# Altium PCB walktimizer_v1.PcbDoc
Units mil, origin at the board's own origin, x right, y up, seen from the top; angles counter-clockwise.
Board outline 1262.8 x 1367.13 mil, 4 copper layers (Top Layer, GND, VREG, Bottom Layer), stack 61.811 mil thick; 30 components, 25 nets, 140 pads, 14 vias.
Unrouted connection lines stored in the file: 45.
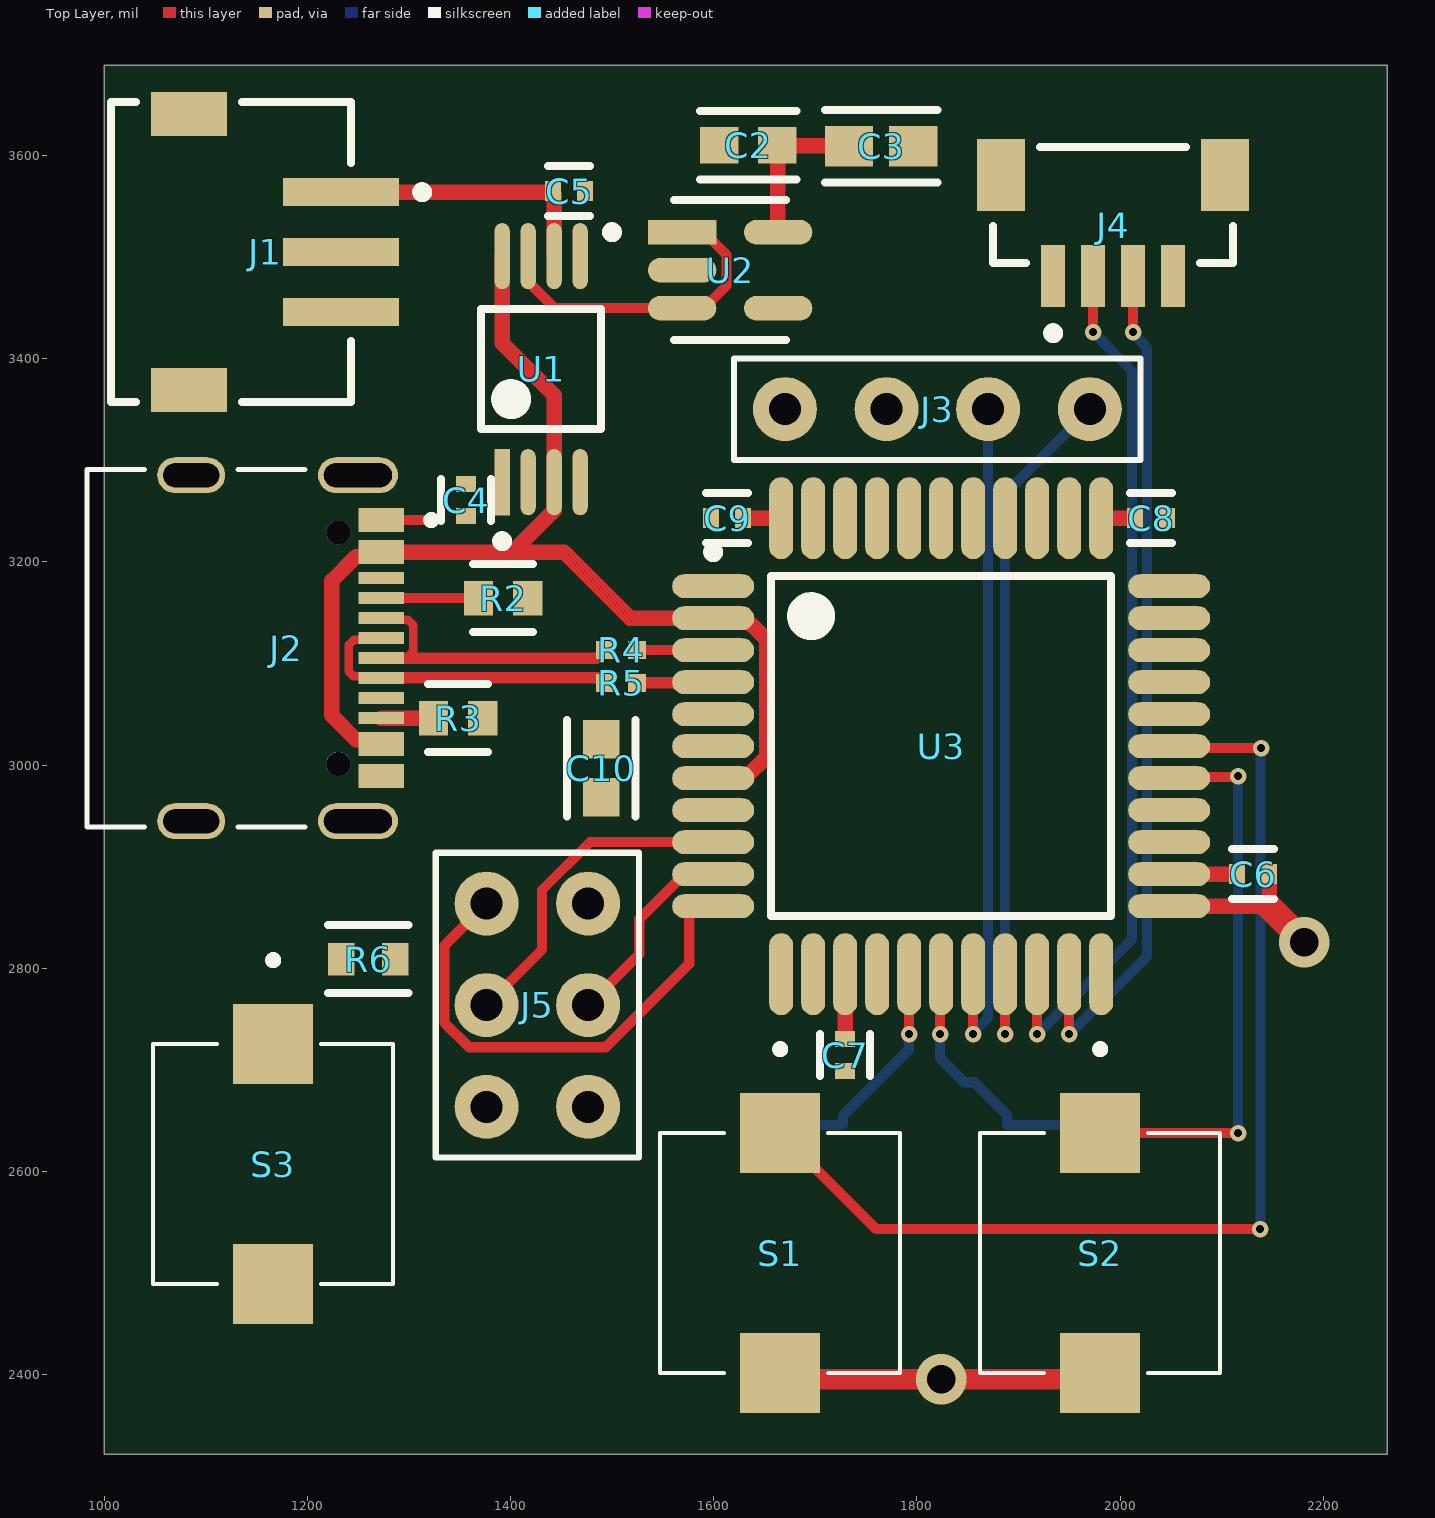
[diagram p0: Top Layer view]
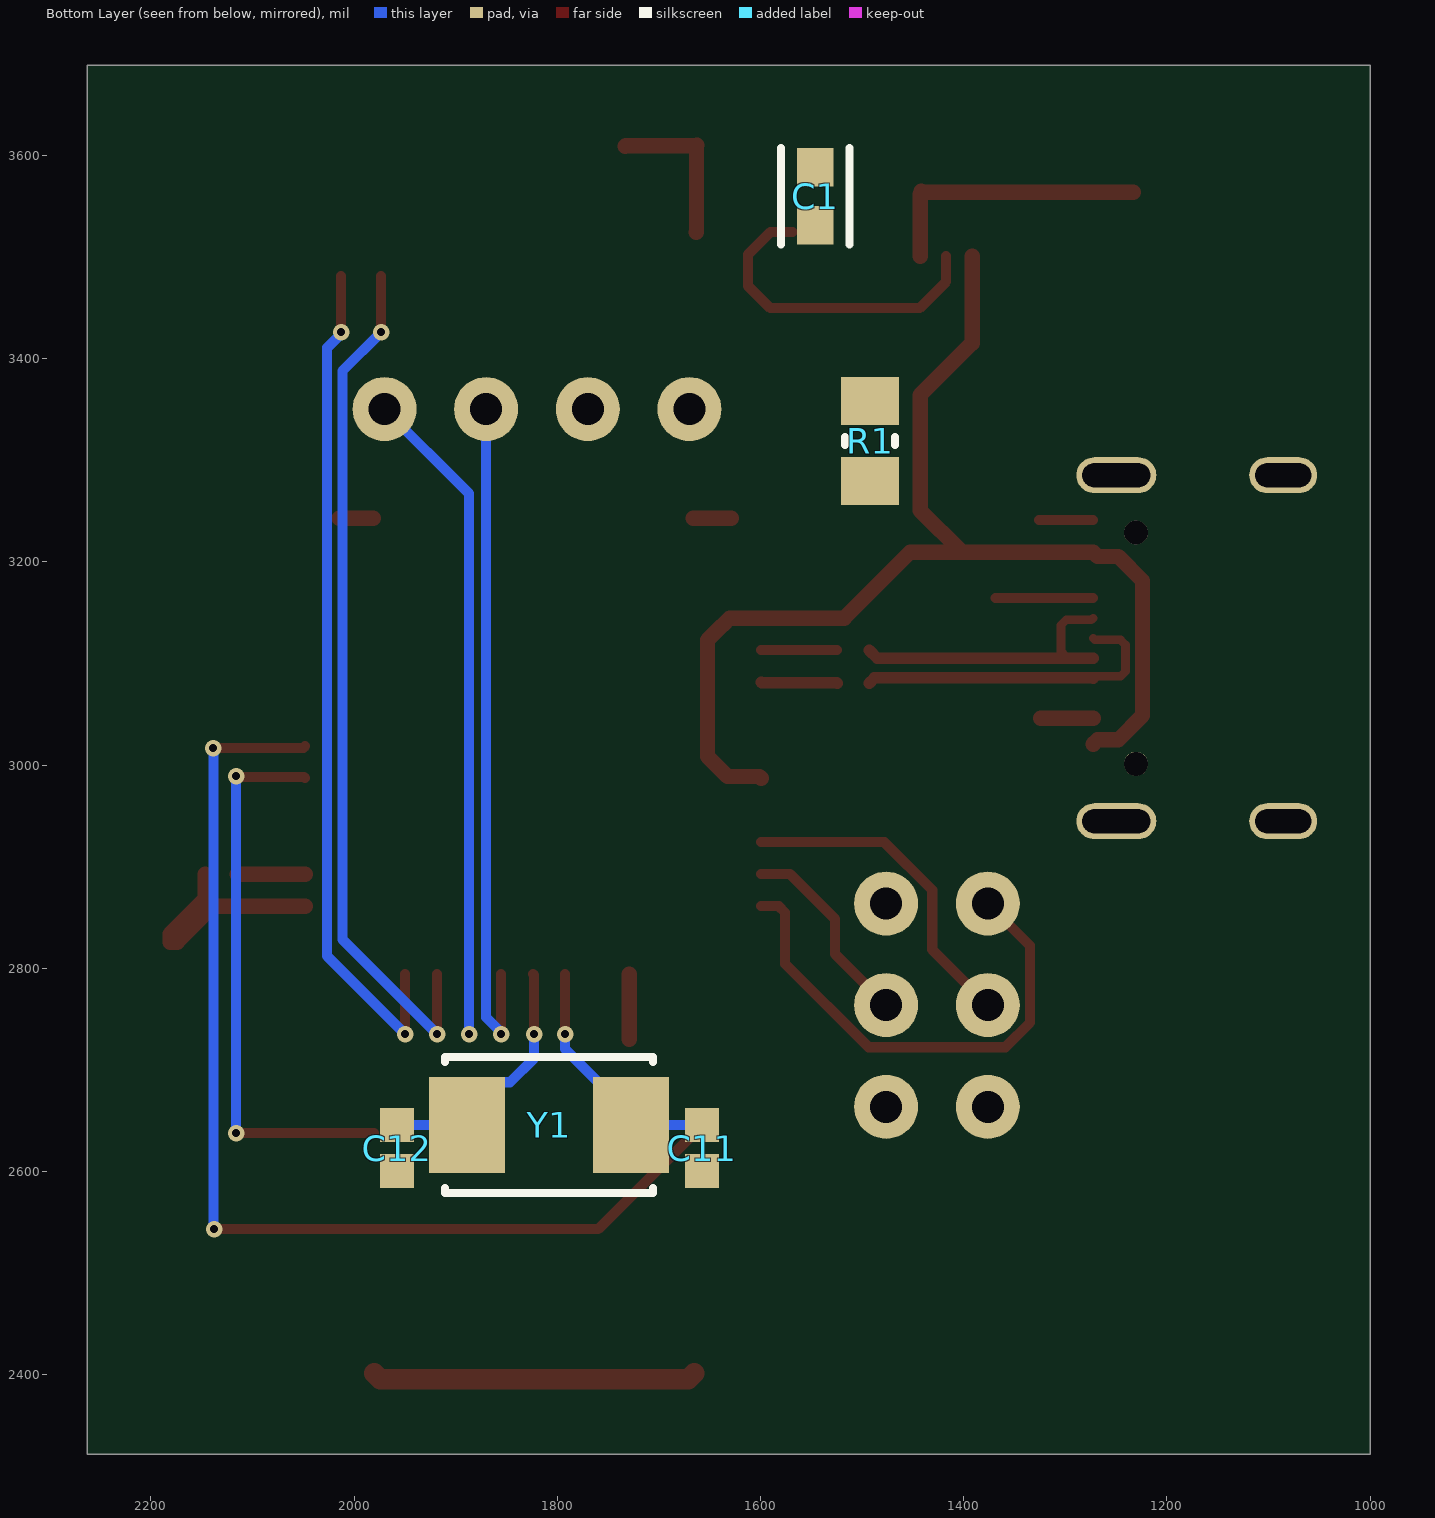
[diagram p1: Bottom Layer view, seen from below]
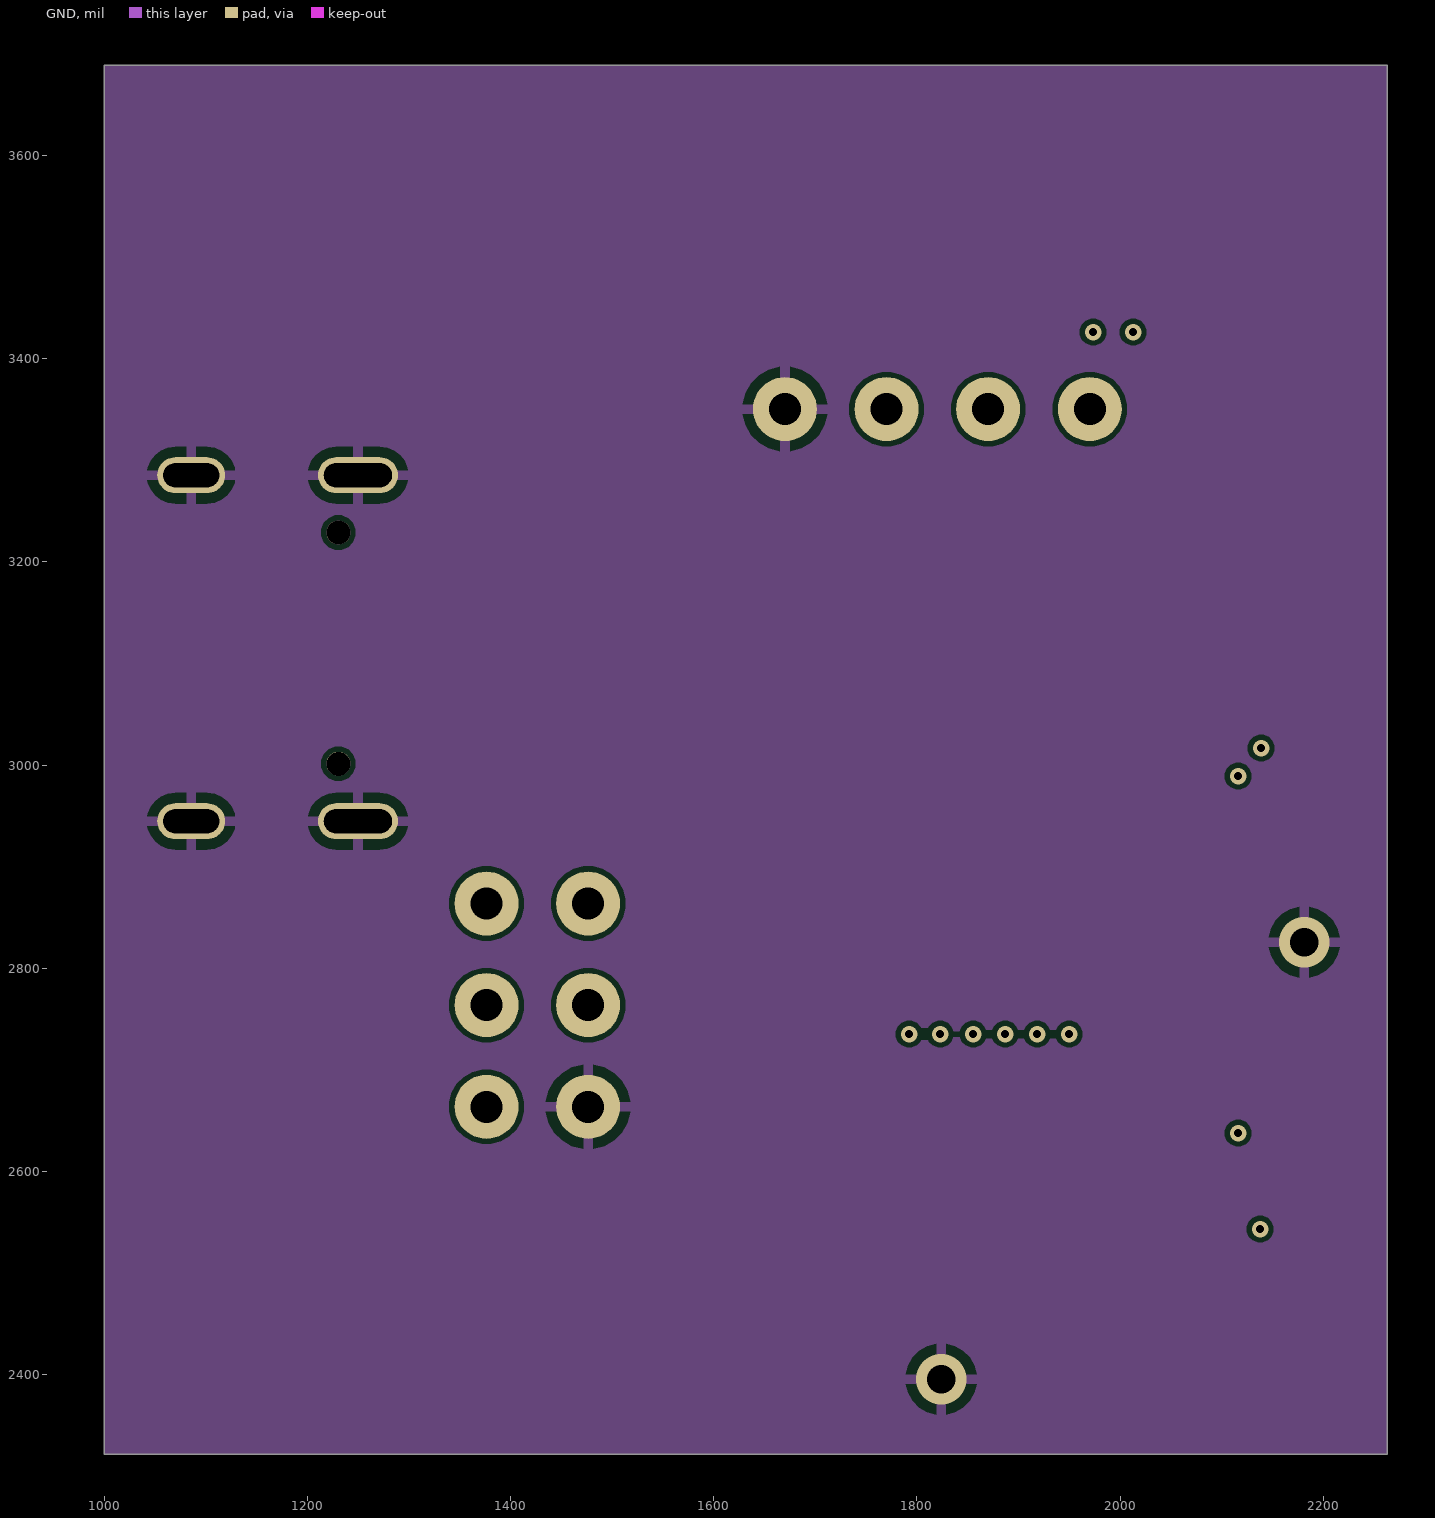
[diagram p2: GND]
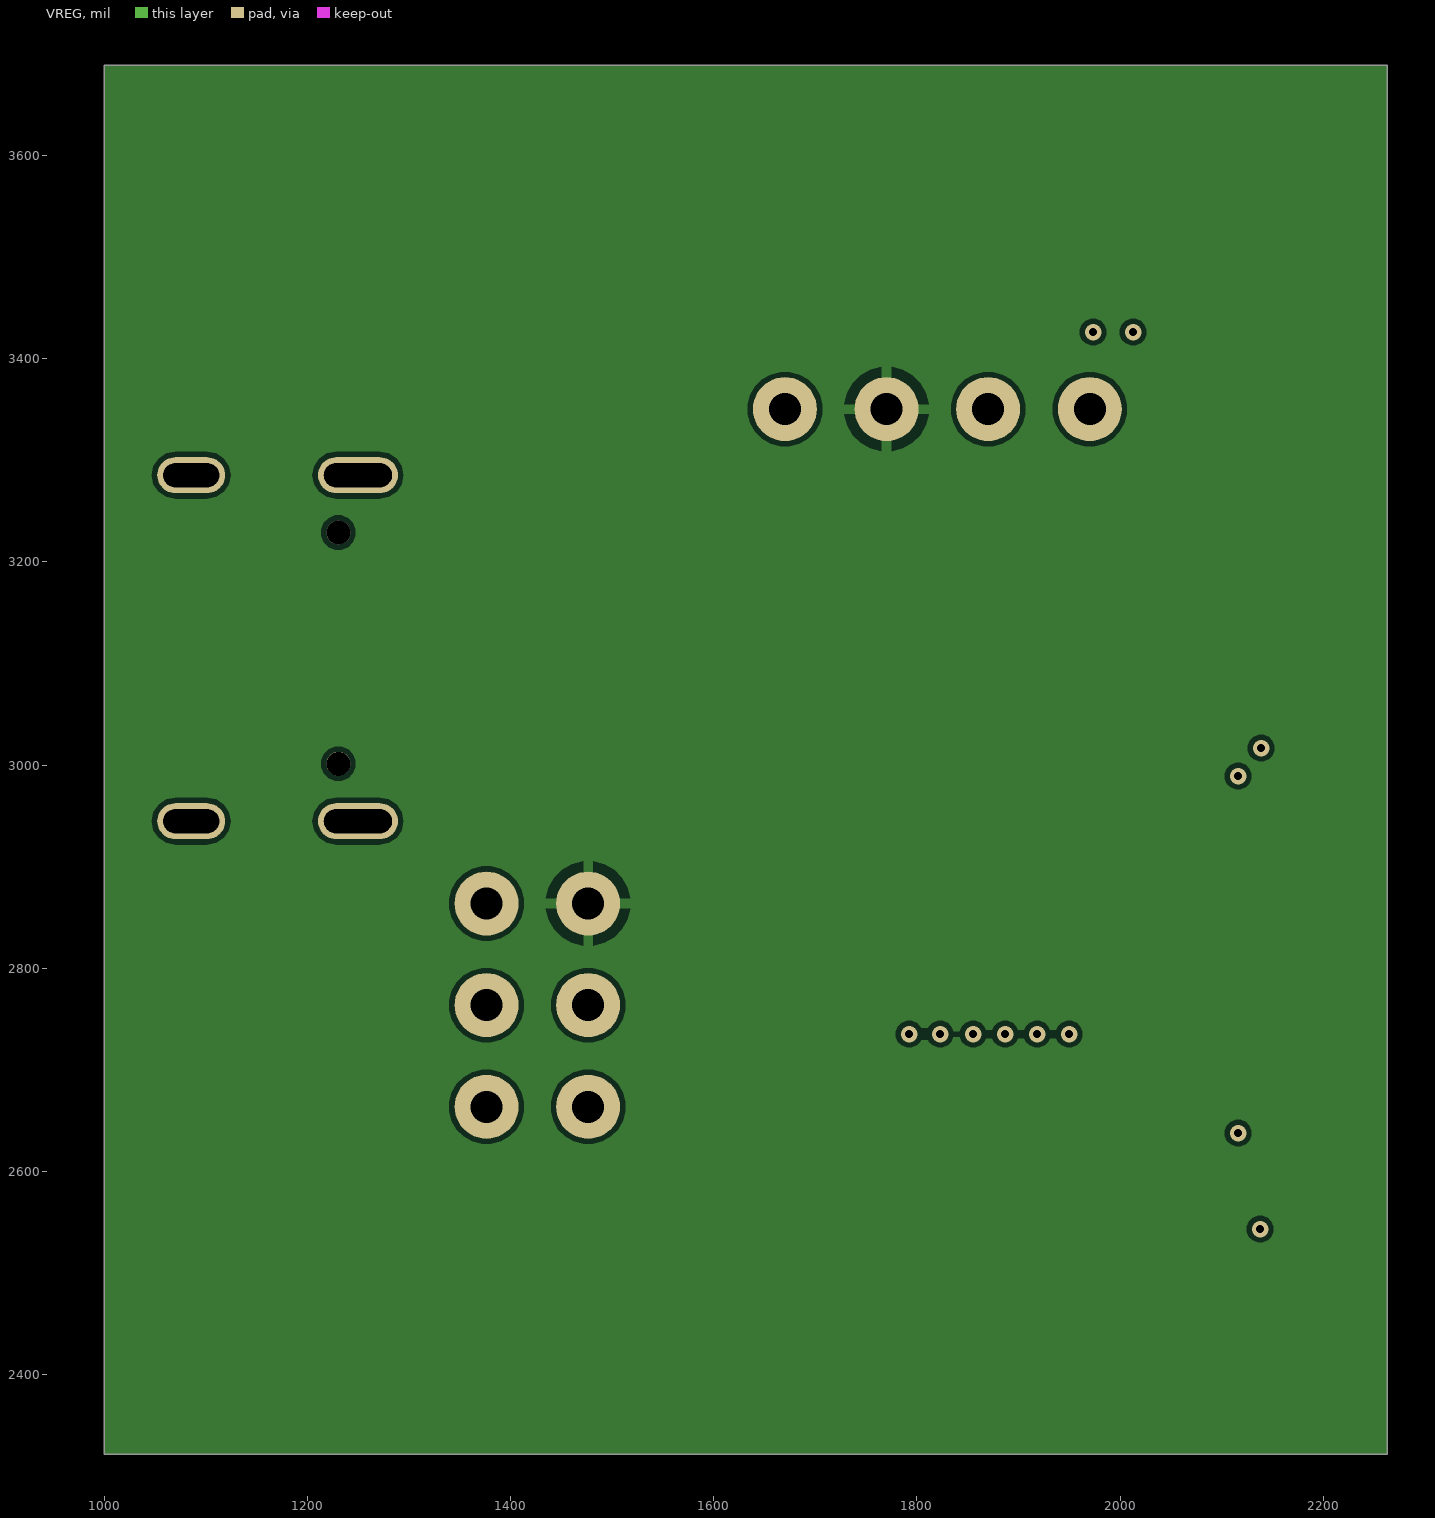
[diagram p3: VREG]
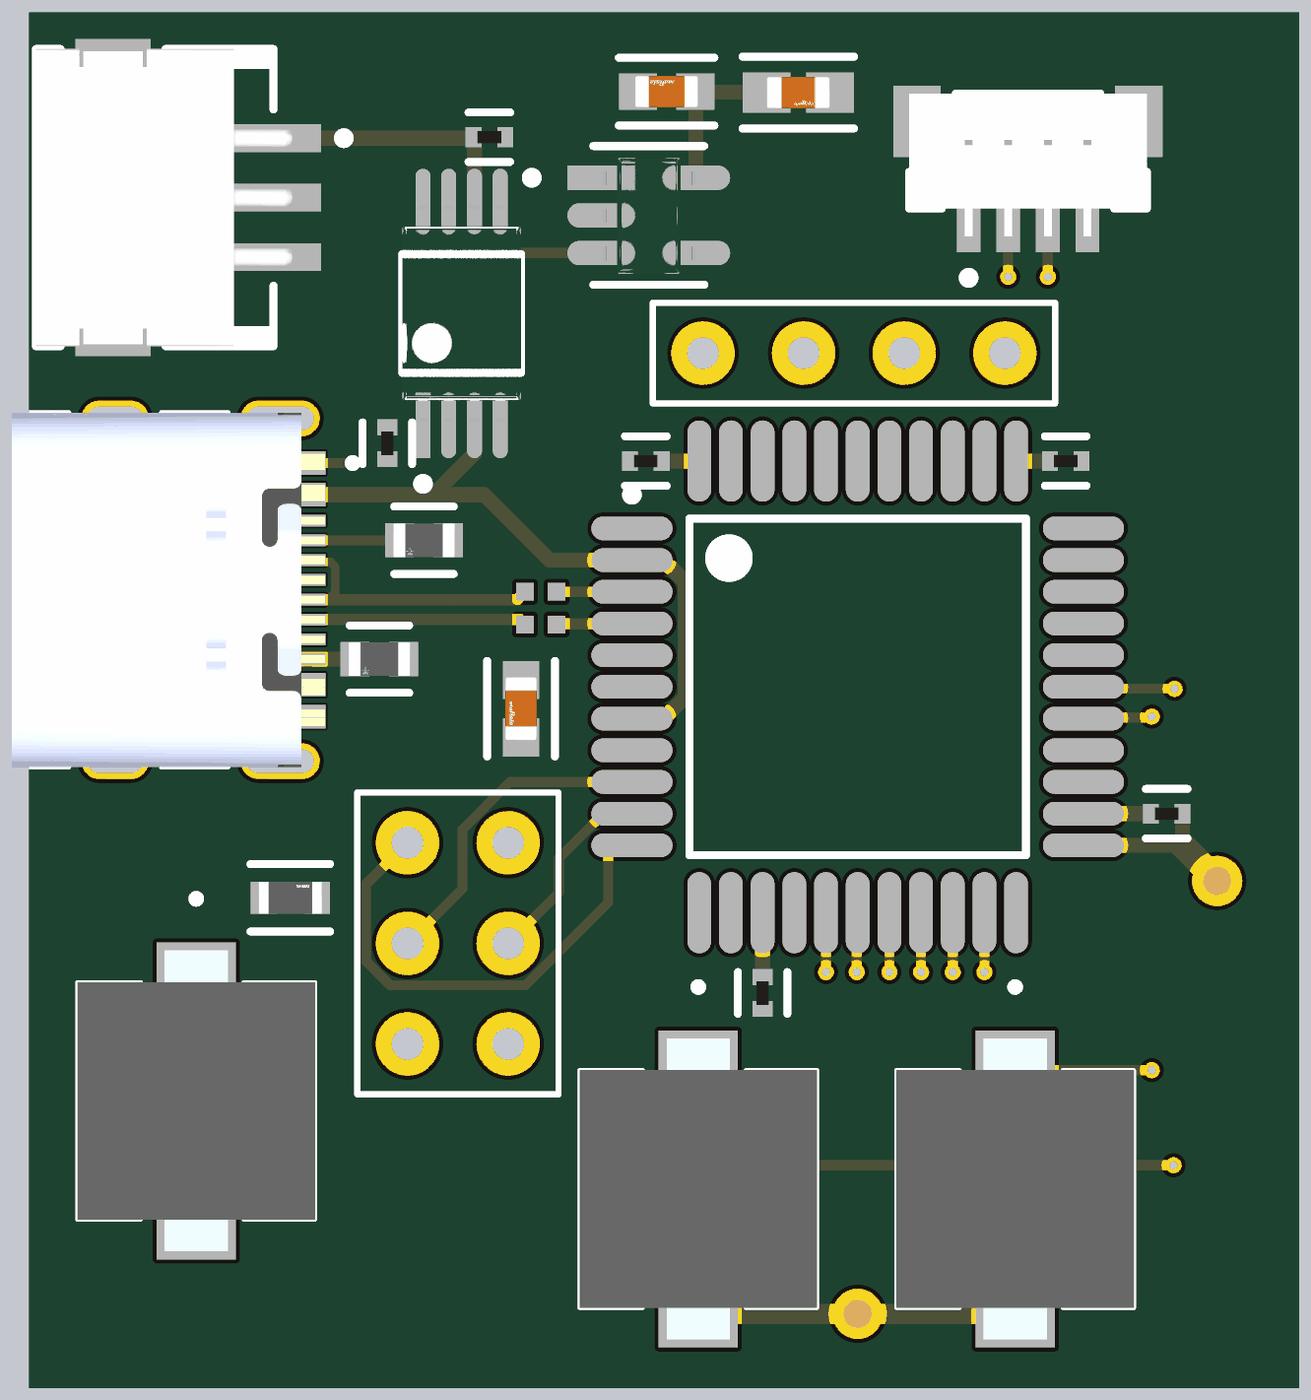
[diagram p4: 3D render of the assembled board from above, using the file's embedded part models]
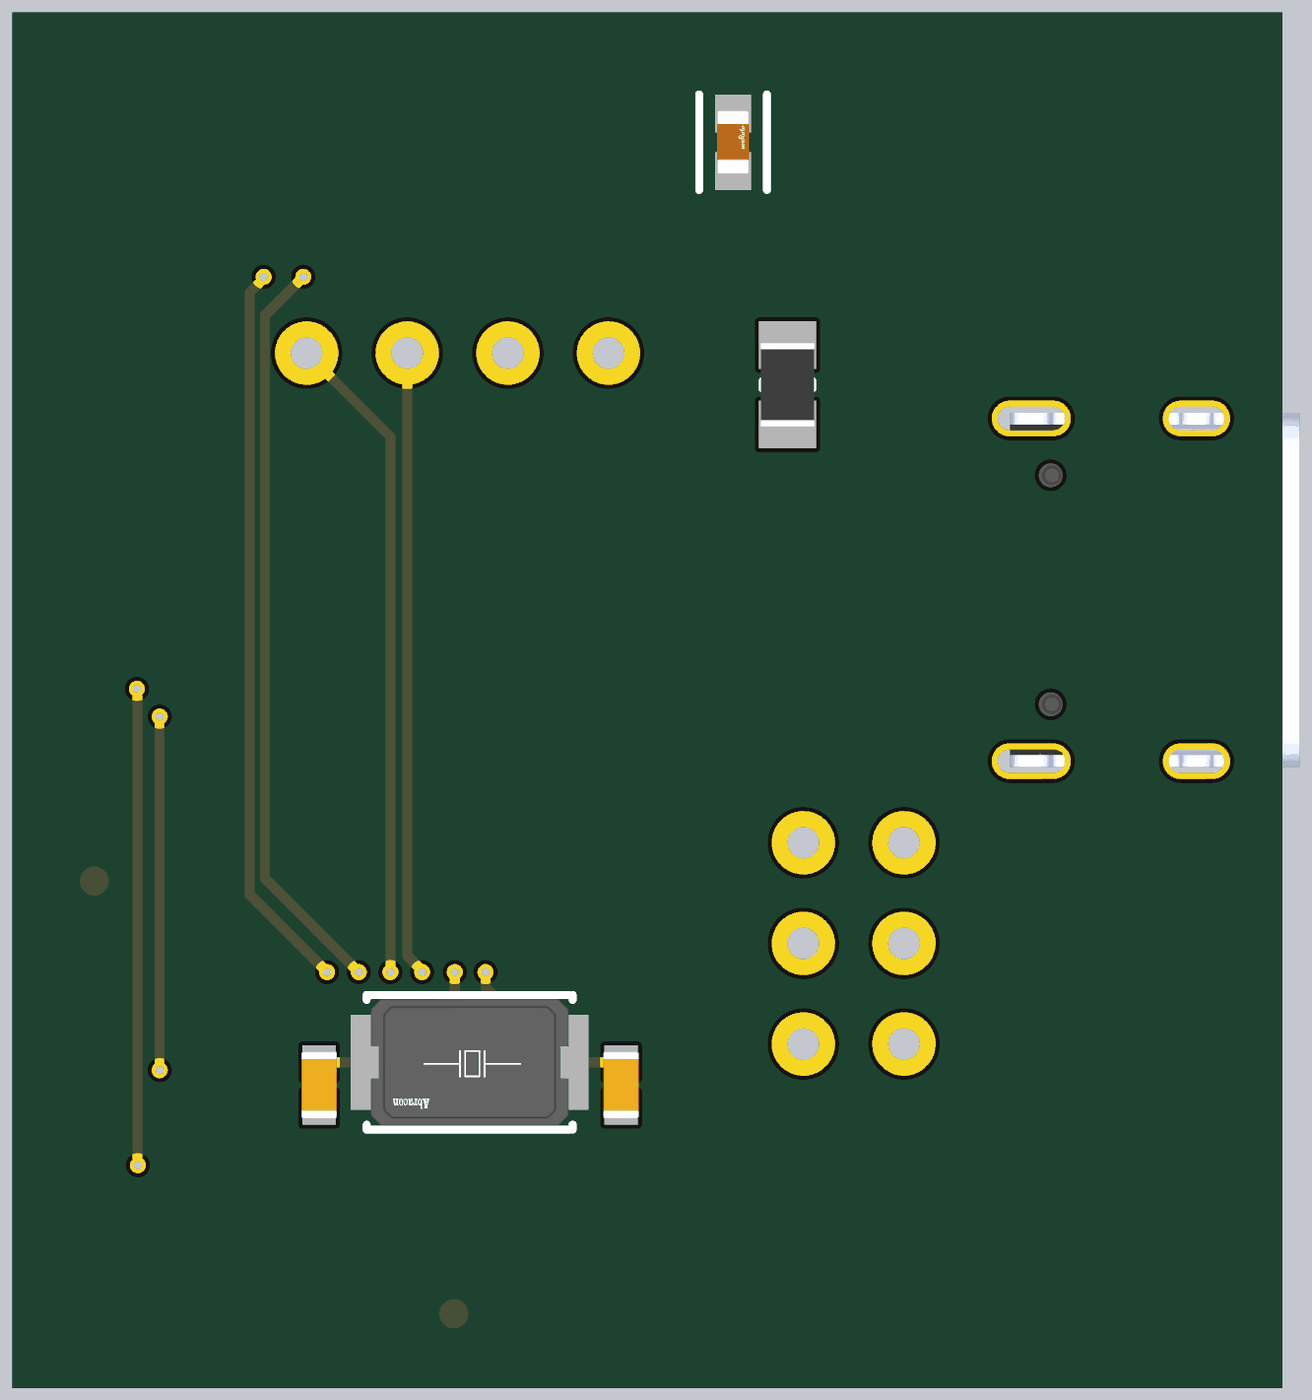
[diagram p5: 3D render of the assembled board from below, using the file's embedded part models]

## Layer stack, top to bottom
Top Solder: solder mask 0.5, Solder Resist, Dk 3.8
Top Layer: signal copper 1.378
Dielectric 1: prepreg 3.937, 2313, Dk 4.05
GND: signal copper 0.689
Core: core 49.803, FR-4, Dk 4.5
VREG: signal copper 0.689
Dielectric 2: prepreg 3.937, 2313, Dk 4.05
Bottom Layer: signal copper 1.378
Bottom Solder: solder mask 0.5, Solder Resist, Dk 3.8

## Board outline
1000,3688.98 2262.8,3688.98 2262.8,2321.85 1000,2321.85

## Design rules (kind name [scope] priority, off if disabled: settings)
Clearance [All] p1: gap=5 ignorepadtopadclearanceinfootprint=TRUE
DiffPairsRouting DiffPair_USBDiffPairsRouting [InDifferentialPairClass('USB')] p1: maxlimit=8 minlimit=8 mostfreqgap=8 toplayer_minwidth=8 toplayer_maxwidth=11.26 toplayer_prefwidth=11.26 midlayer1_minwidth=8 midlayer1_maxwidth=11.26 midlayer1_prefwidth=11.26 midlayer2_minwidth=8 midlayer2_maxwidth=11.26 midlayer2_prefwidth=11.26 bottomlayer_minwidth=8 bottomlayer_maxwidth=11.26 bottomlayer_prefwidth=11.26 maxuncoupledlength=500
DiffPairsRouting [All] p2: maxlimit=10 minlimit=5 mostfreqgap=10 toplayer_maxgap=5 toplayer_prefgap=5 toplayer_minwidth=8.4 toplayer_maxwidth=8.4 toplayer_prefwidth=8.4 midlayer1_mingap=10 midlayer1_minwidth=15 midlayer1_maxwidth=15 midlayer1_prefwidth=15 midlayer2_mingap=10 midlayer2_minwidth=15 midlayer2_maxwidth=15 midlayer2_prefwidth=15 bottomlayer_maxgap=5 bottomlayer_prefgap=5 bottomlayer_minwidth=8.4 bottomlayer_maxwidth=8.4 bottomlayer_prefwidth=8.4 maxuncoupledlength=500
MatchedLengths DiffPair_USBMatchedLengths [InDifferentialPairClass('USB')] p1: tolerance=1000 checknetsindiffpair=FALSE checkdiffpairvsdiffpair=TRUE checkxsignals=TRUE checkothers=TRUE
MinimumSolderMaskSliver [All] p1: minsoldermaskwidth=3.94
PolygonConnect [All] p1: connectstyle=Relief reliefconductorwidth=10 reliefentries=4 polygonreliefangle="90 Angle" airgapwidth=10
RoutingVias [All] p1: holewidth=0 width=50 viastyle="Through Hole" minholewidth=5.91 minwidth=7.87 maxholewidth=248.03 maxwidth=50
SolderMaskExpansion [All] p1: expansion=4 istentingtop=FALSE
SupplyNets "Schematic Supply Nets_2" [InNet('GND')] p1: voltage=0.000
SupplyNets "Schematic Supply Nets_1" [InNet('VREG')] p2: voltage=0.000
SupplyNets "Schematic Supply Nets" [InNet('VSELECT')] p3: voltage=0.000
Width [All] p1: maxlimit=20 minlimit=6.5 preferedwidth=10 minimp=50.000000 maximp=50.000000 favimp=50.000000
28 further rules are at their usual default settings.

## Classes and differential pairs
differential pair class USB: Data USB
differential pair USB: +USB_P -USB_N

## Components (designator, comment, footprint, x,y, rotation, side; value= is the part's Value field where it differs from the comment)
C1 "1.0uF" FP-GRT188-0_1-e0_2_0_5-IPC_B 1546.26,3559.97 r90 bottom
C2 "1.0uF" FP-GRT188-0_1-e0_2_0_5-IPC_B 1633.86,3610.24 r180 top
C3 "10uF" FP-GRM188-0_1-e0_2_0_55-IPC_A 1764.76,3609.25 r0 top
C4 "0.1uF" FP-GRM15-MFG 1356.3,3260.83 r270 top value="100 nF"
C5 "0.1uF" FP-GRM15-MFG 1457.68,3564.96 r180 top value="100 nF"
C6 "0.1uF" FP-GRM15-MFG 2130.91,2892.72 r180 top value="100 nF"
C7 "0.1uF" FP-GRM15-MFG 1729.33,2714.57 r90 top value="100 nF"
C8 "0.1uF" FP-GRM15-MFG 2030.51,3243.11 r180 top value="100 nF"
C9 "0.1uF" FP-GRM15-MFG 1613.19,3243.11 r0 top value="100 nF"
C10 "1.0uF" FP-GRT188-0_1-e0_2_0_5-IPC_B 1489.17,2997.05 r270 top
C11 "18pF" CAPC1608X90X40LL10T20 1657.48,2623.03 r90 bottom
C12 "18pF" CAPC1608X90X40LL10T20 1957.68,2623.03 r90 bottom
J1 "S3B-ZR-SM4A-TF(LF)(SN)" FP-S3B-ZR-SM4A-TF_LF_SN-MFG 1125,3504.92 r90 top
J2 "TYPE-C-31-M-12" HRO_TYPE-C-31-M-12 1085.63,3115.16 r270 top
J3 "HDR_1x4_2.54mm" HDR_1x4_2.5mm_TH 1670.08,3350.39 r90 top
J4 "BM04B-SRSS-TBT(LF)(SN)" FP-BM04B-SRSS-TBT_LF_SN-MFG 1993.11,3551.18 r0 top
J5 "HDR_2x3_2.5mm" HDR_2x3_2.5mm_TH 1376.38,2863.78 r0 top
R1 "1kΩ" RESC2013X60X35ML10T20 1492.13,3318.9 r270 bottom
R2 "5.1kΩ" FP-CRCW0603-e3-IPC_C 1392.72,3164.37 r180 top
R3 "5.1kΩ" FP-CRCW0603-e3-IPC_C 1348.43,3046.26 r180 top
R4 "22Ω" RESC1005X40X25LL05T05 1508.86,3113.19 r0 top
R5 "22Ω" RESC1005X40X25LL05T05 1508.86,3080.71 r0 top
R6 "10kΩ" FP-RC0603-0_55-IPC_C 1259.84,2809.06 r0 top
S1 "SPEH130103" SPEH130103 1665.35,2519.68 r270 top
S2 "SPEH130103" SPEH130103 1980.32,2519.68 r270 top
S3 "SPEH130103" SPEH130103 1166.34,2607.28 r270 top
U1 "TPS2113APWR" FP-PW0008A-IPC_B 1430.12,3389.76 r90 top
U2 "AP2112K-3.3TRG1" FP-SOT25-IPC_A 1616.14,3487.2 r0 top
U3 "ATmega32U4-AU" 44ML_M 1823.82,3018.7 r0 top
Y1 "16MHz" FP-ABM3-MFG 1808.07,2645.67 r0 bottom

## Footprints (in the part's own frame and the unit in brackets; to place one, negate y for a bottom-side part, rotate by r counter-clockwise, add the part's x,y. Pads: shape width x height; smd on the part's side, far side on the other; paste and mask are expansions set on the pad)
44ML_M [mm] "Thin QFP, 44-Leads, Body 10x10mm, Pitch 0.8mm, IPC Low Density"
  oval 2.05x0.6 smd: 1(-5.7,4) 2(-5.7,3.2) 3(-5.7,2.4) 4(-5.7,1.6) 5(-5.7,0.8) 6(-5.7,0) 7(-5.7,-0.8) 8(-5.7,-1.6) 9(-5.7,-2.4) 10(-5.7,-3.2) 11(-5.7,-4) 23(5.7,-4) 24(5.7,-3.2) 25(5.7,-2.4) 26(5.7,-1.6) 27(5.7,-0.8) 28(5.7,0) 29(5.7,0.8) 30(5.7,1.6) 31(5.7,2.4) 32(5.7,3.2) 33(5.7,4)
  oval 0.6x2.05 smd: 12(-4,-5.7) 13(-3.2,-5.7) 14(-2.4,-5.7) 15(-1.6,-5.7) 16(-0.8,-5.7) 17(0,-5.7) 18(0.8,-5.7) 19(1.6,-5.7) 20(2.4,-5.7) 21(3.2,-5.7) 22(4,-5.7) 34(4,5.7) 35(3.2,5.7) 36(2.4,5.7) 37(1.6,5.7) 38(0.8,5.7) 39(0,5.7) 40(-0.8,5.7) 41(-1.6,5.7) 42(-2.4,5.7) 43(-3.2,5.7) 44(-4,5.7)
  silkscreen extent -5.82,-4.25 4.25,4.97, body extent -5,-5 5,5, height 1.2
CAPC1608X90X40LL10T20 [mm] "Chip Capacitor, 2-Leads, Body 1.7x0.9mm, IPC High Density"
  rect 0.85x0.85 smd: 1(-0.575,0) 2(0.575,0)
  body extent -0.85,-0.45 0.85,0.45, height 0.9
FP-ABM3-MFG [mm]
  rect 1.9x2.4 smd paste+0 mask+0: 1(-2.05,0) 2(2.05,0)
  silkscreen extent -2.6,-1.7 2.6,1.7, body extent -2.5,-1.6 2.5,1.6, height 1.3
FP-BM04B-SRSS-TBT_LF_SN-MFG [mm]
  rect 0.6x1.55 smd paste+0 mask+0: 1(-1.5,-1.775) 2(-0.5,-1.775) 3(0.5,-1.775) 4(1.5,-1.775)
  rect 1.2x1.8 smd paste+0 mask+0: 5(-2.8,0.75) 6(2.8,0.75)
  silkscreen extent -3,-3.32 3,1.45, body extent -3,-2.15 3,1.45, height 4.33
FP-CRCW0603-e3-IPC_C [mil]
  rect 28.94x33.94 smd paste+0 mask+0: 1(-24.23,0) 2(24.23,0)
  silkscreen extent -30,-33 30,33, body extent -43,-23 43,23, height 10
FP-GRM15-MFG [mm]
  rect 0.4x0.5 smd paste+0 mask+0: 1(-0.4,0) 2(0.4,0)
  silkscreen extent -0.53,-0.63 0.53,0.63, body extent -0.7,-0.38 0.7,0.38, height 0.25
FP-GRM188-0_1-e0_2_0_55-IPC_A [mil]
  rect 47.57x39.85 smd paste+0 mask+0: 1(-31.57,0) 2(31.57,0)
  silkscreen extent -55,-36 55,36, body extent -75,-40 75,40, height 10
FP-GRT188-0_1-e0_2_0_5-IPC_B [mil]
  rect 37.74x35.91 smd paste+0 mask+0: 1(-28.61,0) 2(28.61,0)
  silkscreen extent -47,-34 47,34, body extent -31,-16 31,16, height 36
FP-PW0008A-IPC_B [mm]
  rect 1.655x0.381 smd paste+0 mask+0: 1(-2.825,0.975)
  rrect100% 1.655x0.381 smd paste+0 mask+0: 2(-2.825,0.325) 3(-2.825,-0.325) 4(-2.825,-0.975) 5(2.825,-0.975) 6(2.825,-0.325) 7(2.825,0.325) 8(2.825,0.975)
  silkscreen extent -4.42,-1.5 1.5,1.5, body extent -3.9,-1.75 3.9,1.75, height 0.25
FP-RC0603-0_55-IPC_C [mil]
  rect 25.93x31.97 smd paste+0 mask+0: 1(-26.64,0) 2(26.64,0)
  silkscreen extent -40,-33 40,33, body extent -31,-16 31,16, height 22
FP-S3B-ZR-SM4A-TF_LF_SN-MFG [mm]
  rect 0.7x2.9 smd paste+0 mask+0: 1(1.5,-2.75) 2(0,-2.75) 3(-1.5,-2.75)
  rect 1.1x1.9 smd paste+0 mask+0: 4(-3.45,1.05) 5(3.45,1.05)
  silkscreen extent -3.75,-4.9 3.75,3, body extent -4.1,-4.3 4.1,3.1, height 0.25
FP-SOT25-IPC_A [mm]
  rect 1.707x0.616 smd paste+0 mask+0: 1(-1.201,0.95)
  rrect100% 1.707x0.616 smd paste+0 mask+0: 2(-1.201,0) 3(-1.201,-0.95) 4(1.201,-0.95) 5(1.201,0.95)
  silkscreen extent -3.08,-1.75 1.4,1.75, body extent -2.55,-2 2.55,2, height 0.25
HDR_1x4_2.5mm_TH [mil]
  round 63 hole 31.5: 1(0,0) 2(0,-100) 3(0,-200) 4(0,-300)
  silkscreen extent -50,-350 50,50
HDR_2x3_2.5mm_TH [mil]
  round 63 hole 31.5: 1(0,0) 2(100,0) 3(0,-100) 4(100,-100) 5(0,-200) 6(100,-200)
  silkscreen extent -50,-250 150,50
HRO_TYPE-C-31-M-12 [mm]
  rect 0.6x1.14 smd mask+0.05: A1_B12(-3.2,4.75) A4_B9(-2.4,4.75) B1_A12(3.2,4.75) B4_A9(2.4,4.75)
  rect 0.3x1.14 smd mask+0.05: A5(-1.25,4.75) A6(-0.25,4.75) A7(0.25,4.75) A8(1.25,4.75) B5(1.75,4.75) B6(0.75,4.75) B7(-0.75,4.75) B8(-1.75,4.75)
  oval 0.9x2 hole 0.6 slot 1.7 at 90 deg: S1(-4.325,4.17) S2(4.325,4.17)
  oval 0.9x1.7 hole 0.6 slot 1.4 at 90 deg: S3(-4.325,0) S4(4.325,0)
  round 0.6 hole 0.6 unplated: ""(-2.89,3.68) ""(2.89,3.68)
  silkscreen extent -4.47,-2.6 4.47,6.1, body extent -4.47,-2.6 4.47,5.31, height 3.31
RESC1005X40X25LL05T05 [mm] "Chip Resistor, 2-Leads, Body 1.00x0.50mm, IPC High Density"
  rect 0.45x0.45 smd: 1(-0.4,0) 2(0.4,0)
  body extent -0.53,-0.27 0.53,0.28, height 0.4
RESC2013X60X35ML10T20 [mm] "Chip Resistor, 2-Leads, Body 2.1x1.35mm, IPC Low Density"
  rect 1.2x1.45 smd: 1(-1,0) 2(1,0)
  silkscreen extent -0.1,-0.63 0.1,0.63, body extent -1.05,-0.68 1.05,0.67, height 0.6
SPEH130103 [mm]
  rect 2x2 smd: 1(-3,0) 2(3,0)
  silkscreen extent -5.2,-3 3,3, body extent -3.8,-3 3.8,3, height 5.1

## Part data
C1 C2 C10: library part CMP-06035-031856-1, "Multi-Layer Ceramic Capacitor 1uF 50V X5R ±10% 0603 Paper T/R / GRT188R61H105KE13D", Capacitance=1uF, Case Code (Imperial)=0603, Case Code (Metric)=1608, Dielectric=X5R, Max Operating Temperature=85°C, Min Operating Temperature=-55°C, Ratings=AEC-Q200, Tolerance=10%, Voltage Rating=50V, Case/Package=0603, Length=0.063inch, Mount="Surface Mount", Packaging="Tape and Reel", Thickness=0.035inch, Voltage Rating (DC)=50V, Width=0.031inch
C3: library part CMP-2006-02792-2, "Chip Multilayer Ceramic Capacitors for General Purpose, 0603, 10uF, X5R, 15%, 20%, 6.3V /  / GRM188R60J106ME47D", Case Code (Imperial)=0603, Case Code (Metric)=1608, Dielectric=X5R, Max Operating Temperature=85°C, Min Operating Temperature=-55°C, Package Quantity=4000, Tolerance=20%, Voltage=6.3V, Capacitance=10uF, Case/Package=0603, Depth=0.8mm, Height=0.8mm, Lead Free="Lead Free", Length=1.6mm, Material=Ceramic, Mount="Surface Mount", Packaging="Tape and Reel", Radiation Hardening=No, REACH SVHC="No SVHC", Termination=SMD/SMT, Thickness=0.035inch, Voltage Rating=6.3V, Voltage Rating (DC)=6.3V, Width=0.031inch
C4 C5 C6 C7 C8 C9: library part CMP-2100-03601-2, "CAP CER 0.1UF 50V X7R 0603CC0603KRX7R9BB104", Capacitance="100 nF", Manufacturer=YAGEO, Manufacturer Part Number=CC0603KRX7R9BB104, Package=CC0603-DA, Temperature="-55°C to +125°C", Temperature Characteristic=X7R, Temperature Coefficient=15%, Temperature Range High=+125°C, Temperature Range Low=-55°C, Tolerance=0.1, Voltage="50 V", Automotive=No, Category=Cap, ComponentLink2Description=Datasheet, ComponentLink2URL=http://www.yageo.com/documents/recent/UPY-GPHC_X7R_6.3V-to-50V_18.pdf, Device Class L1="Passive Components", Device Class L2=Capacitors, Device Class L3="Ceramic Capacitors", Digikey Description="CAP CER 0.1UF 50V X7R 0603", Footprint Url=http://www.yageo.com/exep/pages/download/literatures/UPY-C_GEN_24.pdf, Height=0.9mm, Lead Free=Yes, Material=Ceramic, Mouser Description="Multilayer Ceramic Capacitor, CC Series, 0.1 - F, - 10%, X7R, 50 V, 0603 [1608 Metric]", Octopart=https://octopart.com/cc0603krx7r9bb104-yageo-42244635, RoHS=TRUE, Voltage Rating="50 V"
C11 C12: library part CMP-1659-00030-1, "Chip Capacitor, 18 pF, +/- 5%, 50 V, -55 to 125 degC, 0603 (1608 Metric), RoHS, Tape and Reel / CC0603JRNPO9BN180", Case Code (Imperial)=0603, Case Code (Metric)=1608, Max Operating Temperature="155 degC", Min Operating Temperature="-55 degC", Package Quantity=200, Power Rating="100 mW", Resistance="68.1 Ohm", Tolerance=1%, Voltage Rating="50 V", Case\Package=0603, ComponentLink1Description="Manufacturer URL", ComponentLink1URL=http://www.yageo.com/, ComponentLink2Description=Datasheet, ComponentLink2URL=http://www.yageo.com/NewPortal/yageodocoutput?fileName=/pdf/MLCC/UPY-GP_NP0_16V-to-50V_14.pdf, DatasheetVersion="Rev. 14, 07/2016", Height="0.45 mm", Length="1.6 mm", PackageDescription="2-Pin Surface Mount Device, Body 1.6 x 0.8 mm", PackageReference=0603, Packaging="Tape and Reel", Radiation Hardening=No, RoHSCompliant=true, Width="0.8 mm"
J1: library part CMP-17439-000744-1, "CONN HEADER SMD R/A 3POS 1.5MM", Color=Natural, Contact Resistance=30mR, Current Rating=1A, Flammability Rating="UL94 V-0", Housing Color=Beige, Max Operating Temperature=85°C, Max Voltage Rating (AC)=50V, Min Operating Temperature=-25°C, Connector Type=Header, Contact Finish - Mating=TIN, Contact Material=Brass, Contact Plating=Copper, Contact Shape=Circular, Contact Type="Male Pin", Depth=6.5mm, Fastening Type=Detent, Gender=Male, Height=7.2mm, Housing Material=Polyamide, Insulation Color=Natural, Insulation Material=Nylon, Lead Free="Lead Free", Length=7.5mm, Max Current Rating=1A, Mount="Surface Mount", Number of Contacts=3, Number of Positions=3, Number of Rows=1, Orientation="Right Angle", Packaging="Tape and Reel", Pitch=1.5mm, Series=ZH, Termination=Solder, Voltage Rating=50V, Width=3.5mm
J2: "USB Connectors 24 Receptacle 1 8.94*7.3mm RoHS", Package=Package, Availability="Not in stock", Check_prices=https://www.snapeda.com/parts/TYPE-C-31-M-12/HRO+Electronics+Co.%252C+Ltd./view-part/?ref=eda, MF="HRO Electronics Co., Ltd.", MP=TYPE-C-31-M-12, Price=None, SnapEDA_Link=https://www.snapeda.com/parts/TYPE-C-31-M-12/HRO+Electronics+Co.%252C+Ltd./view-part/?ref=snap
J3 J5: "2x3 2.54mm Pitch Header"
J4: library part CMP-17439-000370-1, "CONN HEADER SMD 4POS 1MM", Color=Natural, Flammability Rating="UL94 V-0", Package Quantity=1, Voltage Rating=50V, Connector Type=Header, Contact Finish - Mating=TIN, Contact Material="Copper Alloy", Contact Plating=Tin, Contact Shape=Square, Contact Type="Male Pin", Fastening Type=Pull, Insulation Color=Natural, Insulation Material=Nylon, Lead Free="Lead Free", Mated Stacking Heights=4.9mm, Mount="Surface Mount", Number of Positions=4, Number of Rows=1, Packaging="Cut Tape", Pitch=0.039inch, Series=SR, Termination=Solder
R1: library part CMP-2100-03671-1, "Chip Resistor, 1 KOhm, +/- 1%, 125 mW, -55 to 155 degC, 0805 (2012 Metric), RoHS, Tape and Reel /  / RC0805FR-071KL", Case Code (Imperial)=0805, Case Code (Metric)=2012, Manufacturer=Yageo, Max Operating Temperature=155degC, Max Power Dissipation=125mW, Min Operating Temperature=-55degC, Package Description="2-Pin Surface Mounted Device, Body 2 x 1.25 mm", Package Quantity=1, Resistance=1KOhm, Temperature Coefficient=100ppm/degreesC, Tolerance=1%, Voltage Rating=150V, Case/Package=0805, Composition=ThickFilm, Datasheet URL=http://www.yageo.com/NewPortal/yageodocoutput?fileName=/pdf/R-Chip/PYu-RC_Group_51_RoHS_L_5.pdf, Datasheet Version="Rev. 5, 10/2016", Depth=1.25mm, Height=0.024inch, Lead Free=LeadFree, Length=0.079inch, Manufacturer URL=http://www.yageo.com/, Military Standard=Not, Number of Pins=2, Number of Terminations=2, Package Reference=0805, Packaging=TapeandReel, Power Rating=125mW, REACH SVHC=Unknown, RoHSCompliant=true, Termination=SMD/SMT, Voltage Rating (DC)=150V, Width=0.049inch
R2 R3: library part CMP-1012-00590-3, "RES Thick Film, 5.1kΩ, 1%, 0.1W, 100ppm/°C, 0603 /  / CRCW06035K10FKEA", Case Code (Imperial)=0603, Case Code (Metric)=1608, Max Operating Temperature=155°C, Min Operating Temperature=-55°C, Package Quantity=5000, Power Rating=100mW, Resistance=5.1kR, Temperature Coefficient=100ppm/°C, Tolerance=1%, Voltage Rating=75V, Case/Package=0603, Composition="Thick Film", Contact Plating=Tin, Depth=0.85mm, Height=0.45mm, Lead Free="Lead Free", Length=1.55mm, Military Standard=Not, Mount="Surface Mount", Packaging="Tape and Reel", Radiation Hardening=No, Termination=SMD/SMT, Voltage Rating (DC)=75V, Weight=7.1E-05oz, Width=0.85mm
R4 R5: library part CMP-2002-08382-1, "CRCW040222R0FKED", Manufacturer="Vishay Dale", Part Number=CRCW040222R0FKED
R6: library part CMP-2100-03664-2, "RES 10K OHM 1% 1/10W 0603 / RC0603FR-0710KL", Case Code (Imperial)=0603, Case Code (Metric)=1608, Max Operating Temperature=155°C, Max Power Dissipation=100mW, Min Operating Temperature=-55°C, Resistance=10kR, Resistance Tolerance=1%, Resistor Type="Thick Film", Temperature Coefficient=100ppm/°C, Voltage Rating=75V, Voltage Rating (DC)=50V, Case/Package=0603, Construction=Rectangular, Depth=0.8mm, Features="Moisture Resistant", Height=0.45mm, Lead Free="Lead Free", Lead Pitch=0.3mm, Length=1.6mm, Military Standard=Not, Number of Pins=2, Number of Terminations=2, Packaging="Tape and Reel", Power Rating=100mW, RoHS Compliant=Yes, Series=RC, Size Code=0603, Termination=SMD/SMT, Tolerance=1%, Weight=7.1E-05oz, Width=0.8mm
S1 S2 S3: "Switch", Manufacturer_Name="ALPS Electric", Mouser Part Number=688-SPEH130101, Height=5mm, Manufacturer_Part_Number=SPEH130103, Mouser Price/Stock=https://www.mouser.co.uk/ProductDetail/Alps-Alpine/SPEH130103?qs=j%252B1pi9TdxUbHXO0CqM0%2FEw%3D%3D
U1: library part CMP-0339-00047-3, "IC OR CTRLR SRC SELECT 8TSSOP", Case/Package=TSSOP, Current - Output 2=1.25A, Max Input Voltage=5.5V, Max Operating Temperature=85°C, Max Power Dissipation=387mW, Min Input Voltage=2.8V, Min Operating Temperature=-40°C, On-State Resistance=84mR, Operating Supply Current=55uA, Output Voltage=6V, Package Quantity=2000, Lead Free="Lead Free", Max Output Current=1.25A, Number of Inputs=2, Number Of Outputs=1, Number of Pins=8, Operating Supply Voltage=5.5V, Output Current=1.25A, Packaging="Tape and Reel", Radiation Hardening=No, REACH SVHC="No SVHC", Turn-Off Delay Time=5ms, Turn-On Delay Time=1ms, Weight=0.001376oz
U2: library part CMP-12756-000035-1, "IC REG LINEAR 3.3V 600MA SOT25", Case/Package=SOT-23-5, Dropout Voltage=250mV, Max Input Voltage=6V, Max Operating Temperature=85°C, Max Output Current=600mA, Min Input Voltage=2.5V, Min Operating Temperature=-40°C, Output Voltage=3.3V, Package Quantity=1, Quiescent Current=55uA, Accuracy=1.5%, Height=1.3mm, Lead Free="Lead Free", Length=3.1mm, Mount="Surface Mount", Number Of Outputs=1, Number of Pins=5, Number of Regulators=1, Output Current=600mA, Output Type=Fixed, Packaging="Tape and Reel", Polarity=Positive, Width=1.7mm
U3: library part CMP-0095-00285-2, "8-bit AVR Microcontroller, 2.7-5.5V, 16MHz, 32KB Flash, 1KB EEPROM, 2.5KB SRAM, USB Controller, 44-pin TQFP, Industrial Grade (-40°C to 85°C), Ext Osc", ComponentLink1Description="Manufacturer URL", ComponentLink1URL=http://www.atmel.com/, ComponentLink2Description="ATmega16U4/32U4 Datasheet", ComponentLink2URL=http://www.atmel.com/dyn/resources/prod_documents/doc7766.pdf, ComponentLink3Description="ATmega16U4 ATmega32U4 Summary", ComponentLink3URL=http://www.atmel.com/dyn/resources/prod_documents/7766S.pdf, DatasheetVersion="revF, Nov-2010", PackageDescription="44-Pin Plastic Thin Quad Flat Pack, 10 x 10 x 1.0 mm Body, 0.8 mm Pitch (TQFP)", PackageReference=44ML, PackageVersion="rev.G, Jul-2007", RevisionNote="DatasheetVersion updated. URLs added."
Y1: library part CMP-27762-004490-1, "Crystal 16MHz ±20ppm 18pF SMD-2 5mm x 3.2mm /  / ABM3-16.000MHZ-D2Y-T", Case/Package=SMD/SMT, ESR (Equivalent Series Resistance)=40R, Frequency Stability=30ppm, Frequency Tolerance=20ppm, Load Capacitance=18pF, Max Operating Temperature=85°C, Min Operating Temperature=-40°C, Operating Frequency="16 MHz", Package Quantity=1000, Resistor Type=Ceramic, Frequency=16MHz, Height=0.051inch, Lead Free="Lead Free", Length=0.197inch, Mount="Surface Mount", Number of Pins=2, Packaging="Tape and Reel", RoHS Compliant=Yes, Series=ABM3, Series Resistance=40R, Termination=SMD/SMT, Tolerance=20ppm, Width=0.126inch

## Via types
v1: diameter 16, hole 8, Top Layer to Bottom Layer, 12 vias
v2: diameter 50, hole 28, Top Layer to GND, 2 vias

## Nets (pads, with @x,y where several pads share a name; then routed paths per layer and width w, separated by ;. In a path a pad name is that pad's centre, name@x,y a point inside that pad or via, vN(x,y) a via of type N, cw(c..) or ccw(c..) an arc to the next point about the centre after c; other vN are vias at no path point)
CC1: J2.A5 R2.2 | length 95.9
  Top Layer w10: J2.A5 R2.2
CC2: J2.B5 R3.2 | length 51.6
  Top Layer w15: J2.B5 R3.2
D+: R5.2 U3.4 | length 75.2
  Top Layer w11.26: R5.2 1525.1,3081.2 1598.92,3081.2 U3.4
D-: R4.2 U3.3 | length 74.8
  Top Layer w10: R4.2 U3.3
GND: C1.2 C2.2 C3.2 C4.1 C5.1 C6.1 C7.1 C8.1 C9.1 C10.1 C11.1 C12.1 J1.2 J1.3 J1.4 J1.5 J2.A1_B12 J2.B1_A12 J2.S1 J2.S2 J2.S3 J2.S4 J3.1 J4.1 J4.5 J4.6 J5.6 R1.1 R2.1 R3.1 S1.2 S2.2 S3.2 U1.2 U1.5 U2.2 U3.5 U3.15 U3.23 U3.35 U3.43 | length 601.8
  Top Layer w10: J2.A1_B12 1325.79,3241.14
  Top Layer w15: U3.23 2138.75,2861.22 2174.19,2825.79 v2(2181.1,2825.79) 2181.1,2833.91 2146.65,2868.35 C6.1
  Top Layer w20: S1.2 1671.26,2395.67 v2(1823.82,2395.67) 1974.41,2395.67 S2.2
GPS_RX: J4.3 U3.21 | length 842.6
  Top Layer w10: v1(1949.8,2735.24) U3.21 ; v1(2012.8,3426.18) J4.3
  Bottom Layer w10: v1(1949.8,2735.24) 2026.58,2812.01 2026.58,3410.77 2012.8,3424.56 v1(2012.8,3426.18)
GPS_TX: J4.2 U3.20 | length 859.6
  Top Layer w10: v1(1918.31,2735.24) U3.20 ; v1(1973.43,3426.18) J4.2
  Bottom Layer w10: v1(1918.31,2735.24) 2011.58,2828.51 2011.58,3388.03 v1(1973.43,3426.18)
ILIM: R1.2 U1.4
INPUT1: S1.1 U3.28 | length 1076.8
  Top Layer w10: S1.1 1759.84,2543.31 v1(2137.8,2543.31) ; U3.28 2050.03,3016.9 2138.62,3016.9 v1(2138.78,3016.73)
  Bottom Layer w10: v1(2137.8,2543.31) 2138.29,2543.8 2138.29,3016.24 v1(2138.78,3016.73)
INPUT2: S2.1 U3.27 | length 555.9
  Top Layer w10: S2.1 v1(2116.14,2637.8) ; U3.27 2049.21,2988.19 2115.16,2988.19 v1(2116.14,2989.17)
  Bottom Layer w10: v1(2116.14,2637.8) v1(2116.14,2989.17)
MISO: J5.1 U3.11 | length 496
  Top Layer w10: J5.1 1334.88,2822.28 1334.88,2746.59 1359.19,2722.28 1493.57,2722.28 1575.87,2804.58 1575.87,2854.93 1582.16,2861.22 U3.11
MOSI: J5.4 U3.10 | length 196.6
  Top Layer w10: J5.4 1526.63,2814.03 1526.63,2848.48 1570.87,2892.72 U3.10
nRESET: J5.5 R6.1 S3.1 U3.13
SCK: J5.3 U3.9 | length 323.9
  Top Layer w10: J5.3 1431.02,2818.42 1431.02,2877.11 1478.12,2924.21 U3.9
SCREEN_SCL: J3.3 U3.18 | length 680.3
  Top Layer w10: v1(1855.32,2735.24) U3.18
  Bottom Layer w10: v1(1855.32,2735.24) 1855.32,2736.86 1870.08,2751.62 J3.3
SCREEN_SDA: J3.4 U3.19 | length 708.7
  Top Layer w10: v1(1886.81,2735.24) U3.19
  Bottom Layer w10: v1(1886.81,2735.24) 1886.81,3267.13 J3.4
UCap: C10.2 U3.6
USB_N: J2.A7 J2.B7 R4.1 | length 291.3
  Top Layer w8.4: J2.B7 1274.34,3142.98 1299.21,3142.98 1304.28,3137.91 1304.28,3112.09 1299.21,3107.02
  Top Layer w11.26: J2.A7 1272.85,3105.1 1485.02,3105.1 R4.1
USB_P: J2.A6 J2.B6 R5.1 | length 318
  Top Layer w8.4: J2.B6 1270.93,3087.34 1245.71,3087.34 1240.79,3092.26 1240.79,3118.37 1245.71,3123.29 1270.93,3123.29 J2.A6
  Top Layer w11.26: J2.B6 1272.85,3085.84 1487.98,3085.84 R5.1
VBAT: C5.2 J1.1 U1.6 | length 273.8
  Top Layer w15: J1.1 1441.56,3563.98 1441.93,3564.35 C5.2 1441.93,3562.99 1442.91,3562.01 U1.6
VREG: C2.1 C3.1 C6.2 C7.2 C8.2 C9.2 J3.2 J4.4 J5.2 R6.2 U2.5 U3.14 U3.24 U3.34 U3.44 | length 358.9
  Top Layer w15: C9.2 U3.44 ; U2.5 1662.94,3525.08 C2.1@1662.94,3609.77 ; C7.2 U3.14 ; C3.1 1732.7,3609.74 C2.1@1662.96,3609.74 ; U3.34 C8.2 ; U3.24 C6.2 ; C2.1@1662.94,3609.77 C2.1 C2.1@1662.96,3609.74
VSELECT: C1.1 U1.7 U2.1 U2.3 | length 323.6
  Top Layer w10: U1.7 1417.32,3475.91 1443.43,3449.8 U2.3 1590.36,3449.8 1612.48,3471.93 1612.48,3502.48 1590.36,3524.61 U2.1
VUSB: C4.2 J2.A4_B9 J2.B4_A9 U1.3 U1.8 U3.2 U3.7 | length 1174.5
  Top Layer w15: J2.B4_A9 1268.33,3024.98 1247.89,3024.98 1224.09,3048.78 1224.09,3181.54 1247.89,3205.33 1268.33,3205.33 J2.A4_B9 1325.79,3209.65 1401.81,3209.65 ; U1.8 1391.73,3415.35 1442.91,3364.17 U1.3 ; U1.3 1442.91,3250.74 1401.81,3209.65 ; U3.7 1601.06,2988.85 1632.49,2988.85 1652.26,3008.63 1652.26,3123.26 1638.02,3137.5 1637.47,3137.5 1630.29,3144.69 U3.2 1517.65,3144.69 1452.69,3209.65 1401.81,3209.65
XTAL1: C12.2 U3.17 Y1.2 | length 251
  Top Layer w10: v1(1822.83,2735.24) 1822.83,2793.31 U3.17
  Bottom Layer w10: v1(1822.83,2735.24) 1822.83,2711.61 1846.54,2687.91 1856.38,2687.91 1888.78,2655.51 Y1.2 C12.2
XTAL2: C11.2 U3.16 Y1.1 | length 245.4
  Top Layer w10: v1(1792.32,2735.24) U3.16
  Bottom Layer w10: C11.2 Y1.1 1727.36,2655.51 1792.32,2720.47 v1(1792.32,2735.24)
pads on no net: J2. J2.A8 J2.B8 U1.1 U2.4 U3.1 U3.8 U3.12 U3.22 U3.25 U3.26 U3.29 U3.30 U3.31 U3.32 U3.33 U3.36 U3.37 U3.38 U3.39 U3.40 U3.41 U3.42

## Polygon pours and split planes (outlines as drawn)
VREG on VREG "VREG_L03_P001" (solid, pour order 1): 1000,3688.98 1000,2321.85 2262.8,2321.85 2262.8,3688.98
GND on GND "GND_L02_P000" (solid, pour order 0): 1000,3688.98 1000,2321.85 2262.8,2321.85 2262.8,3688.98

## Text inside footprints (layer, text, board x,y; h text height)
J2: Mechanical 13 "PCB EDGE" at 1010.83,2910.43 h24 r270